# Altium PCB DK_LOCK_V1.1.PcbDoc
Units mm, origin at the board's own origin, x right, y up, seen from the top; angles counter-clockwise.
Board outline 115 x 45 mm, 2 copper layers (Top Layer, Bottom Layer); 88 components, 61 nets, 346 pads, 184 vias.
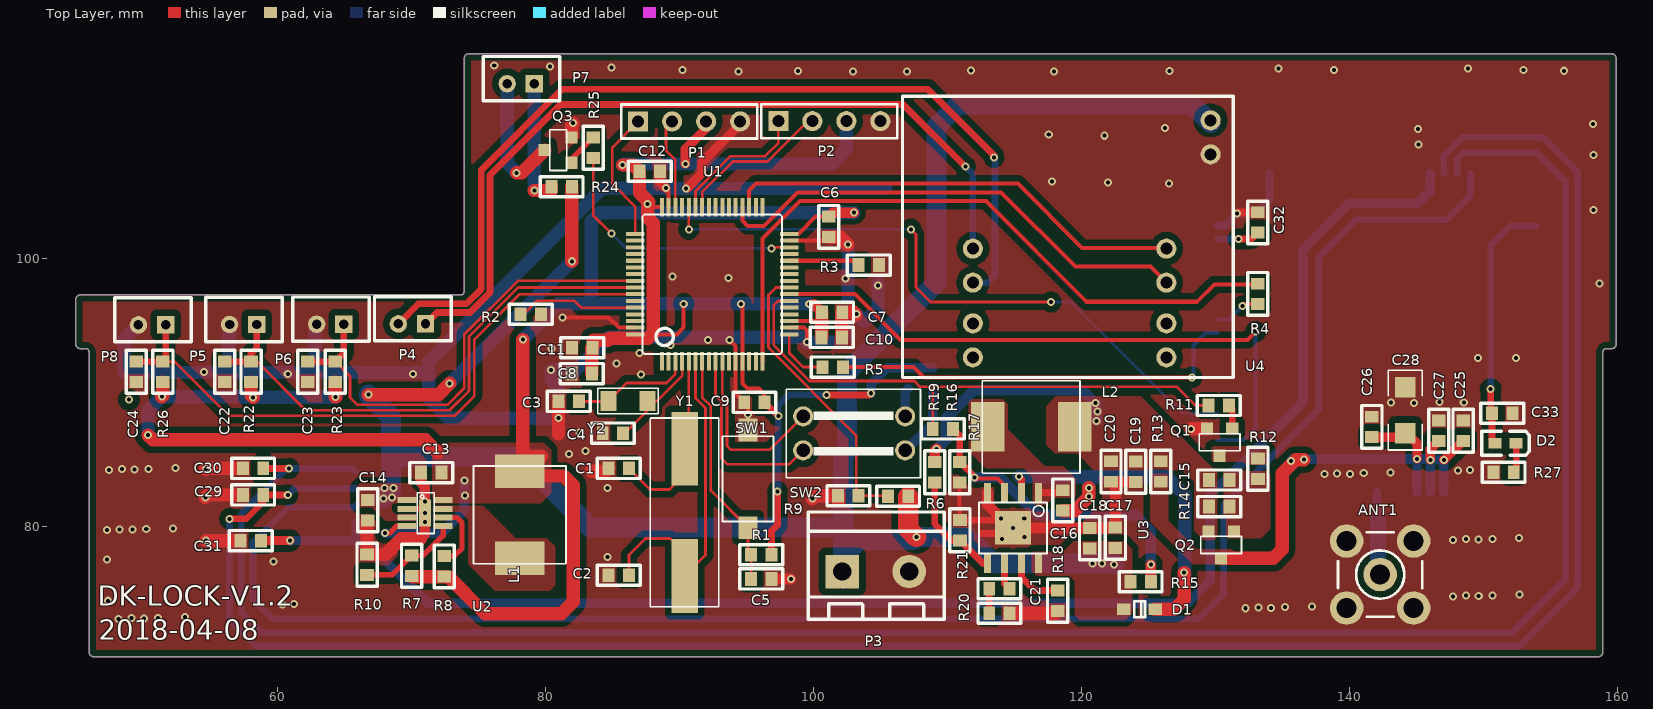
[diagram p0: Top Layer view]
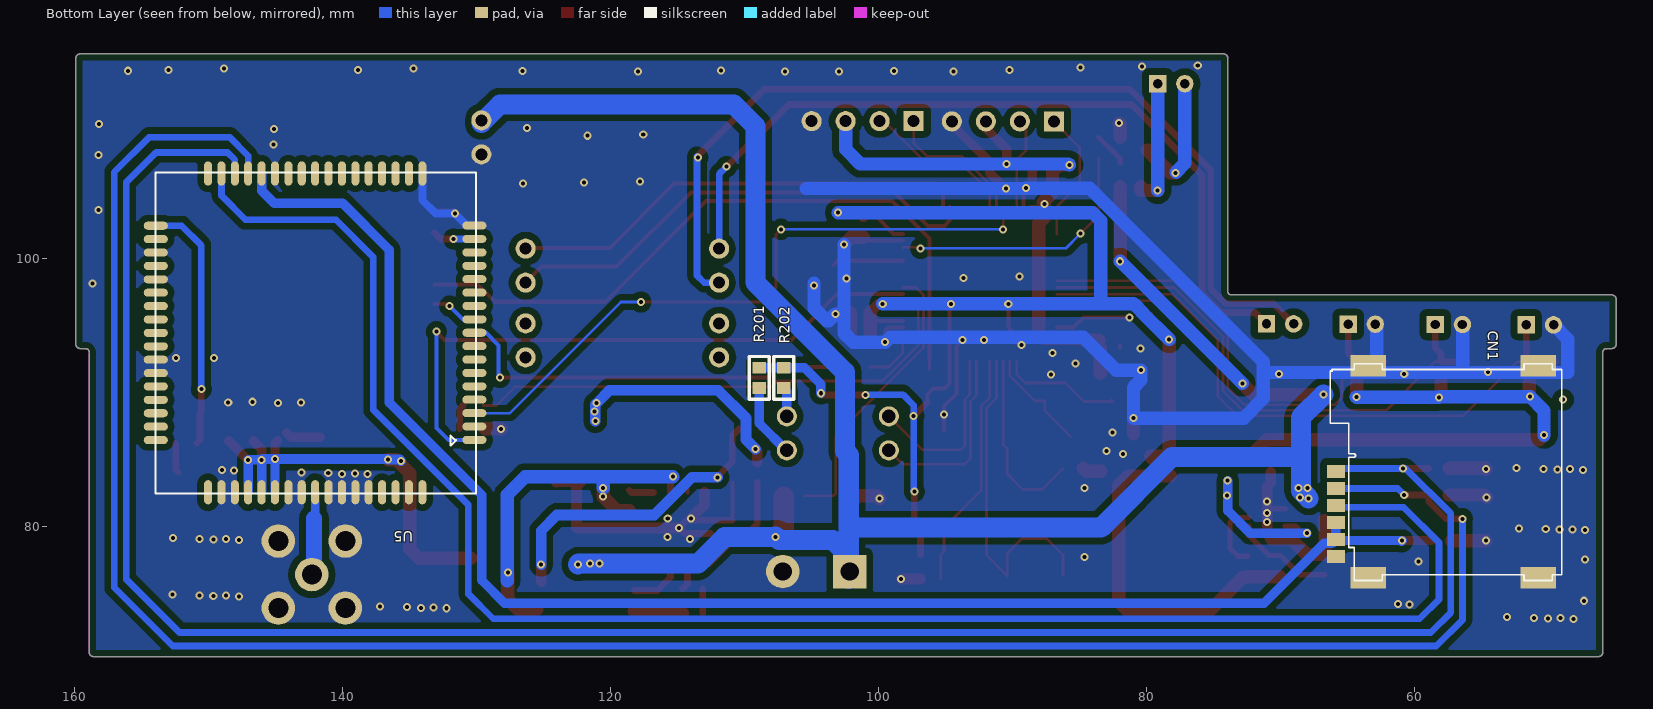
[diagram p1: Bottom Layer view, seen from below]

## Layer stack, top to bottom
Top Solder: solder mask 0.0102, Solder Resist, Dk 3.5
Top Layer: signal copper 0.0356
Dielectric 1: dielectric 0.32, FR-4, Dk 4.8
Bottom Layer: signal copper 0.0356
Bottom Solder: solder mask 0.0102, Solder Resist, Dk 3.5

## Board outline
45.913,72.554 45.913,92.954 ccw(c45.613,92.954) 45.613,93.254 45.213,93.254 cw(c45.213,93.554) 44.913,93.554 44.913,96.954 cw(c45.213,96.954) 45.213,97.254 73.613,97.254 ccw(c73.613,97.554) 73.913,97.554 73.913,114.954 cw(c74.213,114.954) 74.213,115.254 159.613,115.254 cw(c159.613,114.954) 159.913,114.954 159.913,93.554 cw(c159.613,93.554) 159.613,93.254 159.213,93.254 ccw(c159.213,92.954) 158.913,92.954 158.913,70.554 cw(c158.613,70.554) 158.613,70.254 46.213,70.254 cw(c46.213,70.554) 45.913,70.554

## Design rules (kind name [scope] priority, off if disabled: settings)
Clearance [All] p1: gap=0.15 ignorepadtopadclearanceinfootprint=FALSE
DiffPairsRouting d3 [All] p1: maxlimit=0.2 minlimit=0.2 mostfreqgap=0.2 toplayer_minwidth=0.2 toplayer_maxwidth=0.2 toplayer_prefwidth=0.2 bottomlayer_minwidth=0.2 bottomlayer_maxwidth=0.2 bottomlayer_prefwidth=0.2 maxuncoupledlength=12.7
DiffPairsRouting D1 [All] p2: maxlimit=0.2 minlimit=0.2 mostfreqgap=0.2 toplayer_minwidth=0.2 toplayer_maxwidth=0.2 toplayer_prefwidth=0.2 bottomlayer_minwidth=0.2 bottomlayer_maxwidth=0.2 bottomlayer_prefwidth=0.2 maxuncoupledlength=12.7
DiffPairsRouting d2 [All] p3: maxlimit=0.2 minlimit=0.2 mostfreqgap=0.2 toplayer_minwidth=0.2 toplayer_maxwidth=0.2 toplayer_prefwidth=0.2 bottomlayer_minwidth=0.2 bottomlayer_maxwidth=0.2 bottomlayer_prefwidth=0.2 maxuncoupledlength=12.7
DiffPairsRouting [All] p4: maxlimit=0.254 minlimit=0.254 mostfreqgap=0.254 toplayer_minwidth=0.381 toplayer_maxwidth=0.381 toplayer_prefwidth=0.381 bottomlayer_minwidth=0.381 bottomlayer_maxwidth=0.381 bottomlayer_prefwidth=0.381 maxuncoupledlength=12.7
HoleToHoleClearance [All] p1: gap=0.15 allowstackedmicrovias=TRUE
MatchedLengths DiffPair_MatchedLengths [All] p1 off: tolerance=25.4 checknetsindiffpair=FALSE checkdiffpairvsdiffpair=TRUE checkxsignals=TRUE checkothers=TRUE
MatchedLengths DiffPair_MatchedLengths_1 [All] p2 off: tolerance=25.4 checknetsindiffpair=FALSE checkdiffpairvsdiffpair=TRUE checkxsignals=TRUE checkothers=TRUE
MatchedLengths DiffPair_MatchedLengths_2 [All] p3 off: tolerance=25.4 checknetsindiffpair=FALSE checkdiffpairvsdiffpair=TRUE checkxsignals=TRUE checkothers=TRUE
MinimumSolderMaskSliver [All] p1: minsoldermaskwidth=0
PolygonConnect [All] p1: connectstyle=Direct reliefconductorwidth=0.254 reliefentries=4 polygonreliefangle="90 Angle" airgapwidth=0.254
RoutingVias [All] p1: holewidth=0.3 width=0.6 viastyle="Through Hole" minholewidth=0.3 minwidth=0.6 maxholewidth=0.8 maxwidth=1.27
SilkToSilkClearance [All] p1: silktosilkclearance=0
SilkToSolderMaskClearance [IsPad] p1: minsilkscreentomaskgap=0 clearancetoexposedcopper=TRUE
SolderMaskExpansion [All] p1: expansion=0.102
Width [All] p1: maxlimit=2 minlimit=0.2 preferedwidth=0.5
25 further rules are at their usual default settings.

## Classes and differential pairs
component class U_DK_GU600E_V10: ANT1 C25 C26 C27 C28 C29 C30 C31 C32 C33 D2 R27 U5
component class U_DK_STM32L151: C1 C2 C3 C4 C5 C6 C7 C8 C9 C10 C11 C12 P1 P2 R1 R2 R3 R4 R5 R201 R202 SW1 SW2 U1 Y1
component class U_DK_POWER: C13 C14 C15 C16 C17 C18 C19 C20 C21 D1 L1 L2 P3 Q1 Q2 R6 R7 R8 R9 R10 R11 R12 R13 R14 R15 R16 R17 R18 R19 R20 R21 U2 U3
component class U_DK_MOTO: C22 C23 C24 P4 P5 P6 P7 P8 Q3 R22 R23 R24 R25 R26 U4

## Components (designator, comment, footprint, x,y, rotation, side; value= is the part's Value field where it differs from the comment)
ANT1 "SMB" SMB_V-RJ45 142.298,76.378 r0 top locked
C1 "Cap" 0603 84.684,84.303 r0 top value=20pF
C2 "Cap" 0603 84.684,76.327 r0 top value=20pF
C3 "Cap" 0603 80.95,89.306 r0 top value=6.8pF
C4 "Cap" 0603 84.252,86.944 r0 top value=6.8pF
C5 "Cap" 0603 95.326,76.048 r0 top value=0.1uF
C6 "Cap" 0603 101.117,101.575 r90 top value=100nF
C7 "Cap" 0603 102.133,95.961 r180 top locked value=100nF
C8 "Cap" 0603 81.915,91.389 r0 top value=100nF
C9 "Cap" 0603 94.818,89.23 r0 top value=100nF
C10 "Cap" 0603 102.108,94.082 r180 top value=100nF
C11 "Cap" 0603 81.966,93.32 r0 top value=10uF
C12 "NC" 0603 88.519,106.502 r180 top value=10uF
C13 "Cap" 0603 70.688,83.998 r0 top value=4.7uF
C14 "Cap" 0603 66.7,80.416 r90 top value=4.7uF
C15 "Cap" 0603 129.515,83.439 r0 top value=2.2uF
C16 "Cap" 0603 118.593,82.677 r270 top value=0.1uF
C17 "Cap" 0603 122.53,79.883 r270 top value=10uF
C18 "Cap" 0603 120.599,79.858 r270 top value=10uF
C19 "Cap" 0603 124.054,83.287 r90 top value=22uF
C20 "Cap" 0603 122.199,83.312 r90 top value=22uF
C21 "Cap" 0603 114.63,75.311 r180 top value=2.7nF
C22 "Cap" 0603 56.032,90.754 r90 top value=0.1uF
C23 "Cap" 0603 62.23,90.754 r90 top value=0.1uF
C24 "Cap" 0603 49.428,90.754 r90 top value=0.1uF
C25 "Cap" 0603 148.488,87.884 r270 top value=39pF
C26 "Cap" 0603 141.681,88.163 r270 top value=39pF
C27 "Cap" 0603 146.66,87.884 r270 top value=100nF/50V
C28 "Cap" 1206 144.17,90.373 r270 top value=100uF/6.3V
C29 "Cap" 0603 57.379,82.321 r0 top value=39pF
C30 "Cap" 0603 57.379,84.303 r0 top value=39pF
C31 "Cap" 0603 57.201,78.918 r0 top value=100nF
C32 "Cap" 0603 133.147,103.429 r270 top value=1uF
C33 "Cap" 0603 152.171,88.417 r180 top value=100nF
CN1 "SIM_BLOCK" SIM_BLOCK 65.84,77.724 r90 bottom locked
D1 "1N4148WST4" SOD-323 124.333,73.787 r180 top
D2 "LED GREEN" LED0603 150.876,86.182 r0 top locked
L1 "Inductor" 0630 78.054,77.599 r90 top value=22uH
L2 "Inductor" 0630 113.005,87.401 r0 top locked value=4.7uH
P1 "SWD" HDR1X4 86.893,110.211 r0 top
P2 "UART1" HDR1X4 97.358,110.236 r0 top
P3 "BATT" HEAD2L-0.8 102.133,76.606 r0 top
P4 "MOTOR" COM2 71.018,95.098 r180 top
P5 "L_OFF" COM2 58.42,95.047 r180 top locked
P6 "L_ON" COM2 64.922,95.072 r180 top locked
P7 "BELL" COM2 79.146,113.03 r180 top locked
P8 "BUTTON" COM2 51.613,95.021 r180 top locked
Q1 "MOSFET-N" SOT-23A 130.302,86.258 r180 top
Q2 "MOSFET-P" SOT-23A 130.419,78.594 r180 top
Q3 "NPN" SOT-23A 80.918,108.077 r90 top locked
R1 "Res2" 0603 96.85,77.851 r180 top value=10K
R2 "Res2" 0603 79.629,95.809 r180 top value=10K
R3 "Res2" 0603 104.877,99.492 r180 top value=10K
R4 "Res2" 0603 133.147,96.571 r90 top value=3K
R5 "Res2" 0603 102.184,91.872 r180 top locked value=100R
R6 "Res2" 0603 105.537,82.22 r0 top value="30K %1"
R7 "Res2" 0603 69.977,77.8 r270 top value=300K
R8 "Res2" 0603 72.415,77.749 r270 top value=100K
R9 "Res2" 0603 103.353,82.271 r180 top value="10K %1"
R10 "Res2" 0603 66.65,77.876 r270 top value=100K
R11 "Res2" 0603 131.013,89.002 r180 top value=1K
R12 "Res2" 0603 133.172,83.515 r90 top value=10K
R13 "NC" 0603 125.908,84.836 r270 top value=0
R14 "Res2" 0603 129.515,81.458 r0 top value=100K
R15 "NC" 0603 125.171,75.844 r180 top value=0
R16 "Res2" 0603 109.042,83.261 r90 top value="91K 1%"
R17 "Res2" 0603 110.896,83.261 r90 top value=10K
R18 "Res2" 0603 118.212,73.66 r90 top locked value=137K
R19 "Res2" 0603 108.89,87.249 r0 top value=0
R20 "Res2" 0603 114.63,73.482 r180 top value=13K
R21 "Res2" 0603 110.922,80.442 r270 top value="24K 1%"
R22 "Res2" 0603 57.988,92.278 r270 top value=10K
R23 "Res2" 0603 64.287,92.278 r270 top value=10K
R24 "Res2" 0603 80.416,105.334 r0 top value=0
R25 "Res2" 0603 83.541,107.493 r90 top value=1K
R26 "Res2" 0603 51.41,92.278 r270 top value=10K
R27 "Res2" 0603 152.273,84.023 r180 top locked value=1K
R201 "Res2" 0603 108.89,91.821 r270 bottom value=10K
R202 "Res2" 0603 107.061,91.821 r270 bottom value=10K
SW1 "SW-PB" 3*6*4.3 95.098,83.523 r90 top locked
SW2 "SW DIP-2" SW-2*4 103.022,86.919 r90 top locked
U1 "STM32L151RCT6" LQFP64 92.425,98.06 r0 top locked
U2 "TPS62120" TPS62120 69.628,81.94 r270 top
U3 "RT7272B" RT7272B 116.789,82.508 r180 top locked
U4 "MOTO" MOTO2 106.633,91.091 r0 top locked
U5 "GU900E" SIM900-68P 130.049,106.424 r0 bottom locked
Y1 "8M" SMT-OSC 90.373,85.776 r270 top locked
Y2 "32.768M" XTAL32.786 83.884,88.382 r0 top

## Footprints (in the part's own frame and the unit in brackets; to place one, negate y for a bottom-side part, rotate by r counter-clockwise, add the part's x,y. Pads: shape width x height; smd on the part's side, far side on the other; paste and mask are expansions set on the pad)
3*6*4.3 [mm]
  rect 1.7x1.4 smd: 1(-3.65,0) 2(3.65,0)
  silkscreen extent -3.17,-1.91 3.17,1.91
0603 [mil]
  rect 35x40 smd: 1(0,0) 2(60,0)
  silkscreen extent -33,-30 93,30
0630 [mm]
  rect 2.5x3.7 smd: 1(0,0) 2(6.5,0)
  silkscreen extent -0.41,-3.45 6.88,3.45
1206 [mil]
  rect 60x60 smd: 1(0,0) 2(135,0)
  silkscreen extent -50,-50 185,50
COM2 [mm]
  rect 1.3x1.3 hole 0.7: 1(0,0)
  round 1.3 hole 0.7: 2(2.032,0)
  silkscreen extent -1.91,-2.03 3.81,1.27
HDR1X4 [mm] "Connector; Header; 4 Position"
  rect 1.5x1.5 hole 0.9: 1(0,0)
  round 1.5 hole 0.9: 2(2.54,0) 3(5.08,0) 4(7.62,0)
  silkscreen extent -1.27,-1.27 8.89,1.27
HEAD2L-0.8 [mm]
  rect 2.5x2.5 hole 1.35: 1(0,0)
  round 2.5 hole 1.35: 2(5,0)
  silkscreen extent -2.54,-3.56 7.62,4.44
LED0603 [mil]
  rect 38x30 smd: 1(0,0) 2(62,0)
  silkscreen extent -39,-35 101,35
LQFP64 [mm]
  rect 0.3x1.4 smd: 1(-3.75,-5.75) 2(-3.25,-5.75) 3(-2.75,-5.75) 4(-2.25,-5.75) 5(-1.75,-5.75) 6(-1.25,-5.75) 7(-0.75,-5.75) 8(-0.25,-5.75) 9(0.25,-5.75) 10(0.75,-5.75) 11(1.25,-5.75) 12(1.75,-5.75) 13(2.25,-5.75) 14(2.75,-5.75) 15(3.25,-5.75) 16(3.75,-5.75) 33(3.75,5.75) 34(3.25,5.75) 35(2.75,5.75) 36(2.25,5.75) 37(1.75,5.75) 38(1.25,5.75) 39(0.75,5.75) 40(0.25,5.75) 41(-0.25,5.75) 42(-0.75,5.75) 43(-1.25,5.75) 44(-1.75,5.75) 45(-2.25,5.75) 46(-2.75,5.75) 47(-3.25,5.75) 48(-3.75,5.75)
  rect 1.4x0.3 smd: 17(5.75,-3.75) 18(5.75,-3.25) 19(5.75,-2.75) 20(5.75,-2.25) 21(5.75,-1.75) 22(5.75,-1.25) 23(5.75,-0.75) 24(5.75,-0.25) 25(5.75,0.25) 26(5.75,0.75) 27(5.75,1.25) 28(5.75,1.75) 29(5.75,2.25) 30(5.75,2.75) 31(5.75,3.25) 32(5.75,3.75) 49(-5.75,3.75) 50(-5.75,3.25) 51(-5.75,2.75) 52(-5.75,2.25) 53(-5.75,1.75) 54(-5.75,1.25) 55(-5.75,0.75) 56(-5.75,0.25) 57(-5.75,-0.25) 58(-5.75,-0.75) 59(-5.75,-1.25) 60(-5.75,-1.75) 61(-5.75,-2.25) 62(-5.75,-2.75) 63(-5.75,-3.25) 64(-5.75,-3.75)
  silkscreen extent -5.21,-5.21 5.21,5.21
MOTO2 [mm]
  round 1.5 hole 0.9: 1(23,19.2) 2(19.7,9.62) 3(19.7,7.08) 4(19.7,4.04) 5(19.7,1.5) 6(5.25,1.5) 7(5.25,4.04) 8(5.25,7.08) 9(5.25,9.62) 10(23,16.66)
  silkscreen extent 0,0 24.7,21
RT7272B [mm]
  rect 0.5x1.4 smd: 1(0,0) 2(1.27,0) 3(2.54,0) 4(3.81,0) 5(3.81,5.3) 6(2.54,5.3) 7(1.27,5.3) 8(0,5.304)
  rect 2.7x2.5 smd: 9(1.905,2.65)
  silkscreen extent -0.64,0.74 4.44,4.55
SIM900-68P [mm]
  oval 1.8x0.6 smd: 1(0.11,19.99) 2(0.11,18.99) 3(0.11,17.99) 4(0.11,16.99) 5(0.11,15.99) 6(0.11,14.99) 7(0.11,13.99) 8(0.11,12.99) 9(0.11,11.99) 10(0.11,10.99) 11(0.11,9.99) 12(0.11,8.99) 13(0.11,7.99) 14(0.11,6.99) 15(0.11,5.99) 16(0.11,4.99) 17(0.11,3.99) 35(23.9,4) 36(23.9,5) 37(23.9,6) 38(23.9,7) 39(23.9,8) 40(23.9,9) 41(23.9,10) 42(23.9,11) 43(23.9,12) 44(23.9,13) 45(23.9,14) 46(23.9,15) 47(23.9,16) 48(23.9,17) 49(23.9,18) 50(23.9,19) 51(23.9,20)
  oval 0.6x1.8 smd: 18(4,0.1) 19(5,0.1) 20(6,0.1) 21(7,0.1) 22(8,0.1) 23(9,0.1) 24(10,0.1) 25(11,0.1) 26(12,0.1) 27(13,0.1) 28(14,0.1) 29(15,0.1) 30(16,0.1) 31(17,0.1) 32(18,0.1) 33(19,0.1) 34(20,0.1) 52(20,23.9) 53(19,23.9) 54(18,23.9) 55(17,23.9) 56(16,23.9) 57(15,23.9) 58(14,23.9) 59(13,23.9) 60(12,23.9) 61(11,23.9) 62(10,23.9) 63(9,23.9) 64(8,23.9) 65(7,23.9) 66(6,23.9) 67(5,23.9) 68(4,23.9)
  silkscreen extent -0.01,0.01 23.92,24
SIM_BLOCK [mm]
  rect 1x1.35 smd: C1(1.27,0) C2(3.81,0) C3(6.35,0) C5(0,0) C6(2.54,0) C7(5.08,0)
  rect 1.6x2.65 smd: C4(-1.575,-2.413) C8(-1.575,-15.113) C9(14.249,-15.113) C10(14.249,-2.413)
  silkscreen extent -1.79,-16.87 14.39,0.41
SMB_V-RJ45 [mm] "Connector; SMB Straight"
  round 2.5 hole 1.5: 1(0,0) 2(-2.5,-2.5) 2(-2.5,2.5) 2(2.5,-2.5) 2(2.5,2.5)
  silkscreen extent -3.15,-3.15 3.15,3.15
SMT-OSC [mm]
  rect 5.5x2 smd: 1(0,0) 2(9.5,0)
  silkscreen extent -2.29,-2.57 11.81,2.54
SOD-323 [mm]
  rect 1x0.83 smd: 1(1.18,0) 2(-1.18,0)
  silkscreen extent -0.4,-0.6 0.4,0.6, body extent -1.35,-0.62 1.35,0.63, height 1.1
SOT-23A [mm]
  rect 0.9x0.9 smd: 1(-0.95,-1.01) 2(0,1.01) 3(0.95,-1.01)
  silkscreen extent -1.52,-0.64 1.52,0.64
SW-2*4 [mm]
  round 1.5 hole 1: 1(-1.27,-3.81) 2(1.27,-3.81) 3(1.27,3.81) 4(-1.27,3.81)
  silkscreen extent -3.3,-4.95 3.3,5.08
TPS62120 [mm]
  rect 0.45x1.4 smd: 1(0,0) 2(0.65,0) 3(1.3,0) 4(1.95,0) 5(1.95,2.7) 6(1.3,2.7) 7(0.65,2.7) 8(0,2.7)
  rect 2x0.9 smd: 9(0.975,1.35)
  silkscreen extent -0.55,0.76 2.5,2.03
XTAL32.786 [mm]
  rect 1.2x1.5 smd: 1(0.8,0.95) 2(3.7,0.95)
  silkscreen extent 0,0 4.5,1.9

## Part data
ANT1: "SMB Straight Connector", LatestRevisionDate=17-Jul-2002, LatestRevisionNote="Re-released for DXP Platform.", Publisher="Altium Limited"
C1 C2 C3 C4 C5 C6 C7 C8 C9 C10 C11 C13 C14 C15 C16 C17 C18 C19 C20 C21 C22 C23 C24 C25 C26 C27 C28 C29 C30 C31 C32 C33: "Capacitor", LatestRevisionDate=17-Jul-2002, LatestRevisionNote="Re-released for DXP Platform.", PackageDescription="Radial Cap, Thru-Hole; 2 Leads; 0.3 in Pin Spacing", PackageReference=RAD-0.3, Published=8-Jun-2000, Publisher="Altium Limited"
C12: library part Cap, "Capacitor", LatestRevisionDate=17-Jul-2002, LatestRevisionNote="Re-released for DXP Platform.", PackageDescription="Radial Cap, Thru-Hole; 2 Leads; 0.3 in Pin Spacing", PackageReference=RAD-0.3, Published=8-Jun-2000, Publisher="Altium Limited"
CN1: library part SIM_BLOCK_2
D1: library part Diode, "Default Diode", Code_JEDEC=DO-214-AB, LatestRevisionDate=17-Jul-2002, LatestRevisionNote="Re-released for DXP Platform.", PackageDescription="DO-214-AB/SMC; 2 C-Bend Leads; Body 7.9 x 5.9 mm, inc. leads (LxW)", PackageReference=SMC, PackageVersion=Sep-1996, Published=8-Jun-2000, Publisher="Altium Limited"
D2: library part LED2, "Typical RED, GREEN, YELLOW, AMBER GaAs LED", LatestRevisionDate=17-Jul-2002, LatestRevisionNote="Re-released for DXP Platform.", PackageDescription="SM LED; 2 Flat Leads", PackageReference=3.2X1.6X1.1, PackageVersion=Feb-2002, Published=8-Jun-2000, Publisher="Altium Limited"
P1 P2: library part "Header 4", "Header, 4-Pin", LatestRevisionDate=17-Jul-2002, LatestRevisionNote="Re-released for DXP Platform.", Publisher="Altium Limited"
P3 P4 P5 P6 P7 P8: library part "Header 2", "Header, 2-Pin", LatestRevisionDate=17-Jul-2002, LatestRevisionNote="Re-released for DXP Platform.", Publisher="Altium Limited"
Q1: library part NMOS-2, "N-Channel Power MOSFET", ComponentLink1Description="Manufacturer Link", ComponentLink1URL=http://www.irf.com/, DatasheetVersion=PD-9.814, LatestRevisionDate=17-Jul-2002, LatestRevisionNote="Re-released for DXP Platform.", Note="Pin 2 is electrically connected to pin 4.", PackageDescription="TO, Thru-Hole, Vertical, Heatsink Mounted; 3 In-Line Leads; Pitch 2.54 mm", PackageReference=TO-220AB, PackageVersion=Feb-1997, Published=8-Jun-2000, Publisher="Altium Limited"
Q2: library part PMOS-2, "P-Channel Power MOSFET", ComponentLink1Description="Manufacturer Link", ComponentLink1URL=http://www.irf.com/, DatasheetVersion=PD-9.390D, LatestRevisionDate=17-Jul-2002, LatestRevisionNote="Re-released for DXP Platform.", Note="Pin 4 not drawn and electrically connected to Pin 2.", PackageDescription="TO, Thru-Hole, Vertical, Heatsink Mounted; 3 In-Line Leads; Pitch 2.54 mm", PackageReference=TO-220AB, PackageVersion=Feb-1997, Published=8-Jun-2000, Publisher="Altium Limited"
Q3: "NPN Bipolar Transistor", Code_JEDEC=TO-226-AA, LatestRevisionDate=17-Jul-2002, LatestRevisionNote="Re-released for DXP Platform.", PackageDescription="TO, Flat Index; 3 In-Line, Axial Leads; Body Dia. 4.8mm; Leads 0.55 x 0.51 mm (max)", PackageReference=TO-226-AA, Published=8-Jun-2000, Publisher="Altium Limited"
R1 R2 R3 R4 R5 R6 R7 R8 R9 R10 R11 R12 R14 R16 R17 R18 R19 R20 R21 R22 R23 R24 R25 R26 R27 R201 R202: "Resistor", LatestRevisionDate=17-Jul-2002, LatestRevisionNote="Re-released for DXP Platform.", PackageDescription="Axial Device, Thru-Hole; 2 Leads; 0.4 in Pin Spacing", PackageReference=AXIAL-0.4, Published=8-Jun-2000, Publisher="Altium Limited"
R13 R15: library part Res2, "Resistor", LatestRevisionDate=17-Jul-2002, LatestRevisionNote="Re-released for DXP Platform.", PackageDescription="Axial Device, Thru-Hole; 2 Leads; 0.4 in Pin Spacing", PackageReference=AXIAL-0.4, Published=8-Jun-2000, Publisher="Altium Limited"
SW1: "Switch", LatestRevisionDate=17-Jul-2002, LatestRevisionNote="Re-released for DXP Platform.", PackageDescription="Switch; 2 Leads", PackageReference=SPST-2, Published=24-Mar-1999, Publisher="Altium Limited"
SW2: "DIP Switch, 2 Position, SPST", LatestRevisionDate=17-Jul-2002, LatestRevisionNote="Re-released for DXP Platform.", PackageReference=DIP-4, Published=24-Mar-1999, Publisher="Altium Limited"
U1: "ARM Cortex-M3 32-bit MCU, 256 KB Flash, 32 KB Internal RAM, 51 I/Os, 64-pin LQFP, -40 to 85 degC, Tray", I/Os (High Current)=51, Manufacturer=STMicroelectronics, Operating Frequency(F) (Processor speed) (MHz)=32, Supply Voltage(Vcc) min (V)=1.65, ComponentLink1Description="Manufacturer URL", ComponentLink1URL=http://www.st.com/web/en/home.html, ComponentLink2Description=Datasheet, ComponentLink2URL=http://www.st.com/st-web-ui/static/active/en/resource/technical/document/datasheet/DM00048356.pdf, ComponentLink3Description="Package Specification", ComponentLink3URL=http://www.st.com/st-web-ui/static/active/en/resource/technical/document/datasheet/DM00037051.pdf, Core="ARM Cortex-M3", D/A Converter="2x12-bit (2 Channel)", Data E2PROM nom (B)=8192, DatasheetVersion="Rev. 3", FLASH Size (Prog) (kB)=256, Internal RAM Size (kB)=32, Mounting Technology="Surface Mount", PackageDescription="64-Pin Low Profile Quad Flat Package, 10 x 10 mm Body, 0.5 mm Pitch", PackageReference=LQFP64, PackageVersion="Rev. 4, 06/2013", Packing=Tray, PartNumber=STM32L151RCT6
Y1 Y2: library part XTAL, "Crystal Oscillator", LatestRevisionDate=17-Jul-2002, LatestRevisionNote="Re-released for DXP Platform.", PackageDescription="Crystal, Thru-Hole; 2 Leads; Body 3.1 x 8.2 mm (Dia.xH)", PackageReference=R38, Published=8-Jun-2000, Publisher="Altium Limited"
L1 L2: Code_IEC=1005, Code_JEITA=0402, LatestRevisionDate=29-May-2009, LatestRevisionNote="IPC-7351 Footprint Added.", PackageDescription="Chip Inductor", PackageReference=0402-A, Published=8-Jun-2000, Publisher="Altium Limited"

## Via types
v1: diameter 0.6, hole 0.3, Top Layer to Bottom Layer, tented both sides, 184 vias

## Nets (pads, with @x,y where several pads share a name; then routed paths per layer and width w, separated by ;. In a path a pad name is that pad's centre, name@x,y a point inside that pad or via, vN(x,y) a via of type N, cw(c..) or ccw(c..) an arc to the next point about the centre after c; other vN are vias at no path point)
BATT: C14.2 C17.2 C18.2 D1.1 P3.1 R6.2 R15.2 R24.2 U2.1 U2.3 U3.8 U4.1 | length 152.9
  Top Layer w1: v1(66.751,89.814) 71.984,89.814 v1(72.822,90.653) ; v1(81.94,99.771) R24.2
  Top Layer w1.5: R6.2 107.061,79.781 v1(107.671,79.172)
  Bottom Layer w1: v1(72.822,90.653) v1(81.94,99.771)
  Bottom Layer w1.5: v1(66.751,89.814) 68.453,88.113 68.453,85.268 ; v1(67.869,82.067) 68.453,82.652 68.453,85.268 ; P3.1@102.21,76.048 P3.1@102.21,77.775 ; v1(107.671,79.172) 111.481,79.172 113.462,77.191 v1(120.828,77.191) v1(121.539,77.191) 122.377,77.191 v1(122.428,77.14) ; v1@107.671,79.223 107.417,78.969 103.403,78.969 P3.1@102.21,77.775 ; U4.1@129.633,110.091 128.243,111.481 110.795,111.481 109.169,109.855 109.169,98.171 102.489,91.491 102.489,85.598 102.21,85.319 102.21,79.883 ; 68.453,85.268 68.555,85.166 78.075,85.166 83.358,79.883 102.21,79.883 ; P3.1@102.21,77.775 102.21,79.883
  other v1: 68.529,82.144 67.97,82.829 68.631,82.855
BOOT0: R2.2 U1.60 | length 9.2
  Top Layer w0.2: R2.2 78.323,95.809 79.339,96.825 82.118,96.825 82.633,96.31 U1.60
BOOT1: R3.2 U1.28 | length 5.3
  Top Layer w0.3: U1.28 103.035,99.81 R3.2
GND: ANT1.2 C1.1 C2.1 C3.1 C4.1 C5.2 C6.1 C7.1 C8.1 C9.1 C10.1 C11.1 C12.1 C13.1 C14.1 C17.1 C18.1 C19.1 C20.1 C22.1 C23.1 C24.1 C25.1 C26.1 C27.1 C28.1 C29.1 C30.1 C31.1 C32.1 C33.1 CN1.C4 CN1.C5 CN1.C8 CN1.C9 CN1.C10 P1.4 P2.4 P3.2 P5.2 P6.2 P8.2 Q1.3 Q3.3 R2.1 R3.1 R9.2 R10.1 R17.1 R18.1 R20.1 R21.1 R27.2 SW1.2 U1.12 U1.18 U1.31 U1.47 U1.63 U2.2 U2.9 U3.4 U3.9 U4.10 U5.17 U5.18 U5.29 U5.37 U5.39 U5.45 U5.46 U5.53 U5.54 U5.58 U5.59 U5.61 U5.62 U5.63 U5.64 | length 226.2
  Top Layer w0.3: R2.1 R2.1@79.654,95.834 ; v1(81.229,95.58) 84.684,95.58 85.454,94.81 U1.63 ; C11.1 C11.1@81.966,93.466 ; v1(88.976,105.232) 89.175,105.032 U1.47 ; v1(93.726,93.878) 94.175,93.429 U1.12 94.175,89.873 C9.1 95.098,88.951 v1(95.098,88.341) SW1.2 ; U1.18 99.272,94.81 99.492,94.59 v1(99.492,93.726) ; U1.31 100.853,101.31 C6.1 ; R17.1 110.896,80.467 R21.1
  Top Layer w0.4: U2.2 70.653,81.29 v1(70.968,80.976)
  Top Layer w0.5: R21.1 114.3,80.442 v1(114.884,79.858) 114.478,79.451 112.522,79.451
  Top Layer w0.6: v1(131.623,103.327) 131.724,103.429 C32.1
  Top Layer w0.7: C12.1 88.519,105.689 v1(88.976,105.232) ; v1@90.575,105.248 91.669,106.342 91.669,107.163 94.513,110.007 P1.4
  Top Layer w0.8: 70.618,79.065 70.968,79.415 v1(70.968,80.289) U2.9@70.968,80.965 ; C13.1 70.688,83.236 70.968,82.956 v1(70.968,80.976) ; C5.2 v1@98.298,76.048 ; U3.4 112.979,81.585 v1(113.995,80.569) ; v1(114.884,79.858) C18.1 122.504,79.858 C17.1 122.53,82.982 C20.1 124.028,83.312 C19.1
  Top Layer w1: v1(54.585,82.144) 54.762,82.321 C29.1 ; v1(54.61,84.252) 54.661,84.303 C30.1 ; v1(54.635,78.918) C31.1 ; C14.1 66.65,80.366 R10.1 68.024,77.876 69.213,79.065 70.618,79.065 ; 80.95,86.893 v1(80.95,88.062) C3.1 ; Q3.3 81.928,109.995 v1(82.017,110.084) ; 83.396,84.099 84.48,84.099 C1.1 ; v1(99.898,82.042) 100.127,82.271 R9.2 R9.2@101.829,81.911 ; C6.1 102.006,101.575 v1(102.565,101.016) ; C10.1 102.108,95.936 C7.1 102.989,95.961 v1@103.158,95.792 ; R20.1 118.034,73.482 R18.1 ; v1(128.168,87.249) 128.188,87.268 Q1.3
  Bottom Layer w0.6: U5.17 130.73,102.434 v1(131.623,103.327) 133.045,103.327 134.049,104.331 U5.18
  Bottom Layer w1: P8.2 48.514,93.955 48.514,91.465 56.363,91.465 ; P5.2 56.363,95.021 56.363,91.465 ; P6.2 62.789,94.971 62.789,91.542 CN1.C10@62.865,91.465 ; v1(102.565,101.016) 102.565,94.412 101.879,93.726 v1(99.492,93.726) 99.111,94.107 84.709,94.107 82.245,91.643 v1(80.391,91.643) 80.391,90.907 80.95,90.348 v1(80.95,88.062) 72.72,88.062 71.247,89.535 71.247,91.465 ; v1(103.2,95.834) 103.708,95.326 103.861,95.326 104.8,96.266 v1(104.8,97.968) v1@104.8,98.146 ; 105.385,105.207 v1(90.449,105.207) 89.002,105.207 v1(88.976,105.232) 84.201,105.232 71.247,92.278 71.247,91.465 ; 56.363,91.465 CN1.C10@62.865,91.465 ; CN1.C10@62.865,91.465 71.247,91.465
  other v1: 48.108,73.076 50.013,73.101 49.073,73.127 51.054,73.152 53.061,73.203 132.258,73.863 134.163,73.889 133.223,73.914 135.204,73.939 137.211,73.99 60.325,74.143 61.214,74.168 47.32,74.422 147.752,74.752 149.657,74.778 148.717,74.803 150.698,74.828 152.705,74.879 98.298,76.051 59.665,77.368 47.244,77.495 84.607,77.673 147.726,78.969 149.631,78.994 114.046,79.019 148.692,79.019 150.673,79.045 152.679,79.096 115.748,79.172 47.219,79.705 49.124,79.731 48.184,79.756 50.165,79.781 52.172,79.832 115.722,80.569 70.993,81.839 84.607,82.829 138.125,83.871 140.03,83.896 139.09,83.922 141.072,83.947 143.078,83.998 148.107,84.15 148.996,84.176 47.396,84.201 49.301,84.226 48.362,84.252 50.343,84.277 52.349,84.328 81.737,85.369 82.956,85.598 82.525,86.995 144.831,89.179 143.104,89.23 148.539,89.23 146.736,89.281 87.122,91.313 60.731,91.364 70.079,91.364 54.483,91.491 85.293,92.126 149.606,92.532 152.425,92.532 86.995,92.939 80.416,93.269 89.325,93.52 92.126,93.904 158.674,98.12 102.362,98.501 93.624,98.527 89.459,98.628 158.242,103.607 126.543,105.562 121.971,105.639 117.805,105.74 158.217,107.721 145.161,108.483 121.717,109.144 117.551,109.245 145.136,109.652 126.238,109.728 158.191,110.007 94.386,113.944 102.921,113.944 106.959,113.944 117.932,113.944 98.831,113.97 126.568,113.97 156.032,113.995 111.735,114.021 90.221,114.046 138.862,114.046 153.01,114.046 134.696,114.148 148.844,114.148 84.887,114.224 80.315,114.3 76.149,114.402
GPRS_PWR: R11.2 R19.1 U1.22 | length 41.8
  Top Layer w0.2: U1.22 97.343,96.81 97.025,96.492 97.025,93.493 99.688,90.83 107.518,90.83 107.95,90.399 108.814,90.399 ; R19.1 108.89,90.322 108.814,90.399 ; R11.2 128.524,89.002 127.127,90.399 108.814,90.399
GSM_GPRS: C33.2 D2.1 U5.35 | length 18.9
  Top Layer w0.5: v1(150.546,90.221) 150.546,88.519 C33.2 150.647,86.411 D2.1
  Bottom Layer w0.5: v1(150.546,90.221) 150.546,100.94 152.031,102.424 U5.35
L_OFF: C22.2 P5.1 R22.1 U1.57 | length 41.9
  Top Layer w0.2: R22.1 58.42,92.278 62.052,88.646 72.822,88.646 74.26,90.085 74.26,94.149 77.922,97.81 U1.57
  Top Layer w0.3: P5.1@57.988,94.615 P5.1
  Top Layer w0.5: C22.2 R22.1 57.988,92.862 58.42,93.294 P5.1
L_ON: C23.2 P6.1 R23.1 U1.56 | length 35.9
  Top Layer w0.2: R23.1 65.38,91.186 65.38,89.611 65.938,89.052 72.663,89.052 73.91,90.3 73.91,94.294 77.927,98.31 U1.56
  Top Layer w0.5: C23.2 R23.1 64.922,92.913 P6.1
LED0: U1.61
MCU_RX1: P2.1 U1.43 | length 10.5
  Top Layer w0.2: U1.43 91.175,105 93.795,107.62 96.368,107.62 97.358,108.61 P2.1
MCU_TX1: P2.2 U1.42 | length 11.6
  Top Layer w0.2: U1.42@91.725,103.86 U1.42 91.675,104.934 93.961,107.22 96.552,107.22 99.568,110.236 P2.2
MOTO1: U1.35 U4.2 | length 34.6
  Top Layer w0.3: U1.35 95.175,105.056 95.683,105.564 115.238,105.564 120.034,100.768 126.276,100.768 U4.2
MOTO2: U1.36 U4.3 | length 36.6
  Top Layer w0.3: U1.36 94.675,102.81 95.072,102.413 96.291,102.413 98.789,104.91 113.987,104.91 119.532,99.365 125.139,99.365 U4.3
MOTOR1: P4.1 U4.9 | length 60.5
  Top Layer w0.5: P4.1 71.867,95.946 74.336,95.946 75.834,97.445 75.834,106.212 81.102,111.481 106.68,111.481 v1(111.328,106.832)
  Bottom Layer w0.5: v1(111.328,106.832) 111.883,106.277 U4.9
MOTOR2: P4.2 U4.8 | length 70
  Top Layer w0.5: P4.2 70.485,96.596 74.066,96.596 75.184,97.714 75.184,106.583 81.224,112.624 108.509,112.624 113.462,107.671 v1(113.462,107.518)
  Bottom Layer w0.5: U4.8 112.995,98.171 113.538,98.713 113.538,107.594 v1(113.462,107.518)
NetANT1_1: ANT1.1 U5.60 | length 6.2
  Bottom Layer w0.6: ANT1.1@142.049,76.627 142.145,76.329 ANT1.1@142.146,76.327
  Bottom Layer w0.635: 142.049,80.861 U5.60
  Bottom Layer w1.194: ANT1.1@142.146,76.327 142.146,80.562
NetC15_1: C15.1 C19.2 C20.2 L2.2 Q2.3 R13.1 R14.1 R16.2 | length 17.4
  Top Layer w0.8: R16.2 109.042,85.623 v1(109.169,85.75)
  Bottom Layer w0.8: v1(109.169,85.75) 109.88,86.462 109.88,88.062 111.963,90.145 120.066,90.145 v1(121.031,89.179) 121.133,89.078 v1(121.133,87.833)
  other v1: 121.183,88.544
NetC15_2: C15.2 Q2.1 R12.1 R14.2
NetC16_1: C16.1 L2.1 U3.1 | length 1.9
  Top Layer w0.5: U3.1 118.423,82.508 C16.1
NetC16_2: C16.2 D1.2 U3.2 | length 29
  Top Layer w0.5: v1(115.341,83.693) 115.519,83.515 U3.2
  Top Layer w1: C16.2 119.507,81.153 v1(120.548,82.194) v1(120.548,82.855) ; D1.2 126.924,73.787 127.66,74.524 v1(127.66,76.53)
  Bottom Layer w1: v1(115.341,83.693) 120.548,83.693 ; v1(120.548,82.855) 120.548,83.693 ; 127.711,75.921 127.711,82.347 126.365,83.693 120.548,83.693
NetC21_1: C21.1 U3.6 | length 2.1
  Top Layer w0.5: U3.6 114.249,75.692 C21.1
NetC21_2: C21.2 R20.2 | length 1.8
  Top Layer w0.5: R20.2 C21.2
NetC32_2: C32.2 U5.16 | length 3.2
  Top Layer w0.5: v1(131.711,101.434) 132.676,101.434 C32.2
  Bottom Layer w0.5: U5.16 v1(131.711,101.434)
NetD2_2: D2.2 R27.1 | length 2.2
  Top Layer w0.5: R27.1 152.451,84.201 D2.2
NetL1_1: L1.1 U2.7
NetP7_1: P7.1 R24.1 | length 9.5
  Top Layer w1: v1(79.146,105.054) 80.416,105.054 R24.1
  Bottom Layer w1: v1(79.146,105.054) P7.1
NetP7_2: P7.2 Q3.2 | length 9.7
  Top Layer w1: v1(77.826,106.375) 78.207,106.375 Q3.2
  Bottom Layer w1: P7.2 77.114,107.086 v1@77.775,106.426
NetQ1_1: Q1.1 R11.1 | length 1.8
  Top Layer w0.5: R11.1 131.252,88.763 Q1.1
NetQ1_2: Q1.2 R12.2
NetQ3_2: Q3.1 R25.2 | length 2.6
  Top Layer w0.4: Q3.1 81.928,107.405 R25.2
NetR4_1: R4.1 U5.10 | length 3.5
  Top Layer w0.3: v1(132.004,96.418) 132.156,96.571 R4.1
  Bottom Layer w0.3: U5.10 131.02,95.434 v1(132.004,96.418)
NetR4_2: R4.2 U1.16 | length 51.6
  Top Layer w0.2: U1.16@96.175,91.683 U1.16
  Top Layer w0.3: U1.16 96.175,101.458 98.984,104.267 112.851,104.267 120.369,96.749 128.626,96.749 129.921,98.044 R4.2@133.147,98.044
NetR5_1: R5.1 U5.9 | length 30.9
  Top Layer w0.3: R5.1 107.467,91.872 108.229,91.11 v1@128.118,91.11
  Bottom Layer w0.3: v1(128.245,91.11) 128.346,91.211 128.346,93.472 129.309,94.434 U5.9
NetR5_2: R5.2 U1.17 | length 4.3
  Top Layer w0.2: U1.17 98.175,92.909 99.212,91.872 R5.2
NetR6_1: R6.1 R9.1 U1.24 | length 21.8
  Top Layer w0.2: U1.24 97.175,97.81 96.625,97.26 96.625,93.328 103.175,86.778 103.175,82.448 R9.1 105.486,82.271 R6.1
NetR7_1: R7.1 R10.2 U2.5 | length 7.6
  Top Layer w0.4: R10.2 68.529,76.352 R7.1 70.841,77.8 72.328,79.288 U2.5
NetR8_1: R8.1 U2.6 | length 5.1
  Top Layer w0.4: U2.6 73.36,80.64 73.736,80.264 73.736,78.334 73.152,77.749 R8.1
NetR15_1: R15.1 R17.2 R19.2 U3.3 | length 25.9
  Top Layer w0.3: v1@112.141,83.566 113.716,83.566 114.249,83.033 U3.3
  Top Layer w0.5: R19.2 110.896,86.766 R17.2 110.922,84.785 v1@112.141,83.566
  Top Layer w0.8: R15.1 v1(125.171,77.114)
  Bottom Layer w0.8: v1(112.014,83.642) 113.907,83.642 116.727,80.823 124.003,80.823 125.171,79.654 v1(125.171,77.114)
NetR16_1: R16.1 R21.2 U3.5 | length 8.3
  Top Layer w0.5: R16.1 109.042,80.162 110.287,78.918 R21.2 112.632,77.208 U3.5 U3.5@112.971,77.216
NetR18_2: R18.2 U3.7 | length 4.1
  Top Layer w0.5: U3.7 115.519,76.175 116.51,75.184 R18.2
NetR25_1: R25.1 U1.30 | length 20
  Top Layer w0.2: R25.1 83.541,103.2 v1(84.887,101.854) ; v1(96.85,100.736) 96.924,100.81 U1.30 U1.30@98.125,100.76
  Bottom Layer w0.2: v1(84.887,101.854) 86.004,100.736 v1(96.85,100.736)
NetR201_2: R201.2 SW2.1 | length 5.5
  Bottom Layer w0.7: SW2.1 106.858,85.649 108.89,87.681 R201.2
NetR202_2: R202.2 SW2.2 | length 2.2
  Bottom Layer w0.7: SW2.2 106.832,90.068 R202.2
NetU1_44: U1.44 U5.3 | length 49.3
  Top Layer w0.2: v1@90.675,102.085 v1(90.675,102.159) U1.44 ; v1(107.264,102.159) 107.645,101.778 107.645,97.815 108.737,96.723 v1(117.729,96.723)
  Bottom Layer w0.2: v1(90.675,102.159) v1(107.264,102.159) v1@107.29,102.133 ; v1(117.729,96.723) 119.228,96.723 127.516,88.434 U5.3
OSC32_IN: C3.2 U1.3 Y2.1 | length 9.2
  Top Layer w0.2: C3.2@82.576,89.409 C3.2 84.658,89.306 Y2.1 86.03,90.678 89.002,90.678 89.675,91.352 U1.3
OSC32_OUT: C4.2 U1.4 Y2.2 | length 7.9
  Top Layer w0.2: C4.2@85.649,86.69 87.584,88.625 Y2.2 88.29,89.332 90.175,91.217 U1.4
OSC_IN: C1.2 U1.5 Y1.1 | length 13.9
  Top Layer w0.2: C1.2 87.782,82.728 89.23,82.728 90.373,83.871 Y1.1 90.675,86.078 U1.5
OSC_OUT: C2.2 U1.6 Y1.2 | length 25.3
  Top Layer w0.2: C2.2 86.208,77.851 87.427,79.07 89.256,79.07 90.373,77.953 Y1.2 91.923,77.825 91.923,88.798 91.175,89.546 U1.6
PC1: SW2.4 U1.9 | length 14.1
  Top Layer w0.2: U1.9 92.675,89.743 93.123,89.295 93.123,85.058 93.574,84.607 98.171,84.607 SW2.4
PC2: SW2.3 U1.10 | length 13.3
  Top Layer w0.2: U1.10 93.175,89.809 93.523,89.461 93.523,85.979 93.802,85.7 96.723,85.7 SW2.3
PWON: U1.23 U5.1 | length 46.9
  Top Layer w0.3: U1.23 103.071,97.31 106.477,93.904 132.385,93.904 v1(132.994,94.513)
  Bottom Layer w0.3: U5.1 132.104,86.434 132.994,87.325 v1(132.994,94.513)
RESET: C5.1 R1.2 SW1.1 U1.7 | length 17.8
  Top Layer w0.2: U1.7 91.675,89.611 92.323,88.964 92.323,82.648 SW1.1 95.098,78.08 R1.2 C5.1
SIM_CLK: C30.2 CN1.C3 U5.32 | length 160.5
  Top Layer w0.5: C30.2 v1(60.833,84.303)
  Bottom Layer w0.5: CN1.C3 65.611,84.303 v1(60.833,84.303) 60.63,84.303 57.252,80.924 57.252,73.558 58.75,72.06 152.171,72.06 156.159,76.048 156.159,105.664 153.924,107.899 148.59,107.899 148.049,107.358 U5.32
SIM_DATA: C29.2 CN1.C7 U5.31 | length 165.5
  Top Layer w0.5: v1(56.388,80.543) 57.633,80.543 58.903,81.813 C29.2 v1(60.731,82.321)
  Bottom Layer w0.5: v1(56.388,80.543) 56.388,73 58.344,71.044 152.679,71.044 157.048,75.413 157.048,106.426 154.432,109.042 148.438,109.042 147.049,107.654 U5.31 U5.31@147.056,106.317 ; v1(60.731,82.321) 61.214,82.804 CN1.C7
SIM_RST: CN1.C2 U5.33 | length 129.9
  Bottom Layer w0.5: CN1.C2 65.713,81.407 60.782,81.407 58.141,78.765 58.141,74.524 59.588,73.076 128.753,73.076 130.607,74.93 130.607,81.585 137.719,88.697 137.719,100.101 140.487,102.87 147.244,102.87 149.049,104.675 U5.33
SIM_VCC: C31.2 CN1.C1 CN1.C6 U5.30 | length 115.1
  Top Layer w0.7: C31.2 v1(60.884,78.918)
  Bottom Layer w0.7: v1@60.935,78.867 v1(60.884,78.918) 65.764,78.918 CN1.C1 ; CN1.C6 CN1.C1 ; U5.30 146.049,105.053 145.085,104.089 139.979,104.089 136.512,100.622 136.512,89.218 129.616,82.321 129.616,75.946 127.914,74.244 71.202,74.244 66.722,78.724 66.11,78.724 CN1.C1
SW1: C24.2 P8.1 R26.1 U1.58 | length 48
  Top Layer w0.2: R26.1 52.273,92.278 56.312,88.24 73.203,88.24 74.66,89.697 74.66,93.939 78.031,97.31 U1.58
  Top Layer w0.5: C24.2 R26.1 51.613,92.481 P8.1
SWCLK: P1.1 U1.49 | length 9.9
  Top Layer w0.2: U1.49 86.675,103.85 84.963,105.562 84.963,108.28 P1.1
SWDIO: P1.2 U1.46 | length 7
  Top Layer w0.2: P1.2 88.976,109.753 88.976,108.026 89.675,107.327 U1.46 U1.46@89.625,103.86
V3.3: C6.2 C7.2 C8.2 C9.2 C10.2 C11.2 C12.2 C13.2 L1.2 P1.3 P2.3 R1.1 R7.2 R8.2 R22.2 R23.2 R26.2 R201.1 R202.1 U1.13 U1.19 U1.32 U1.48 U1.64 U2.4 U2.8 | length 233.5
  Top Layer w0.3: v1@87.859,104.013 88.062,103.81 U1.48 ; 87.944,94.31 89.789,94.31 90.297,94.818 v1(90.297,96.596) ; v1(94.59,96.596) 94.675,96.511 U1.13 94.675,90.643 95.047,90.272 95.91,90.272 96.342,89.84 C9.2 ; U1.19 100.339,95.31 ; U1.32 98.863,101.81 100.152,103.099 C6.2
  Top Layer w0.4: v1(67.996,79.477) 68.351,79.477 68.865,79.99 U2.4
  Top Layer w0.5: C9.2 v1(97.358,88.214) ; R1.1 96.85,79.629 97.307,80.086 v1(97.307,82.575) ; v1(100.965,89.789) 104.165,89.789 v1(104.292,89.916)
  Top Layer w0.7: v1(90.424,107.036) 90.424,108.153 91.973,109.703 P1.3
  Top Layer w0.8: 100.011,96.56 C7.2 ; C6.2 101.422,103.403 v1(102.997,103.403)
  Top Layer w1: v1(50.292,86.792) 50.648,86.436 70.993,86.436 71.933,85.496 ; v1(51.333,89.662) 51.41,89.738 R26.2 ; R22.2 57.988,89.764 v1(58.141,89.611) ; R23.2 64.287,89.662 v1(64.313,89.637) ; R7.2@70.028,76.225 R8.2 72.39,76.2 72.746,76.2 75.489,73.457 81.153,73.457 82.042,74.346 82.042,83.033 81.333,83.741 78.207,83.741 78.207,83.744 79.68,85.217 78.588,85.217 78.283,85.522 v1(78.283,93.929) ; C8.2 83.439,93.269 C11.2 ; 83.541,93.878 84.62,93.878 84.753,94.01 87.644,94.01 87.944,94.31 88.025,94.391 88.025,102.61 87.605,103.03 v1(87.605,104.064) ; v1(85.725,106.959) 86.538,106.959 C12.2 86.995,104.877 v1@87.706,104.165 ; C10.2 100.609,94.107 C7.2
  Bottom Layer w0.5: v1(97.307,82.575) 97.358,82.626 v1(97.358,88.214) 97.358,89.002 98.171,89.814 100.94,89.814 v1(100.965,89.789)
  Bottom Layer w0.7: v1(67.996,79.477) 72.238,79.477 73.914,81.153 v1(73.914,83.388) ; v1(104.292,89.916) 104.292,90.602 105.512,91.821 R202.1 R201.1
  Bottom Layer w1: v1(50.292,86.792) 50.292,88.621 v1(51.333,89.662) 58.09,89.662 v1(58.141,89.611) 64.287,89.611 v1(64.313,89.637) ; v1(78.283,93.929) 80.279,95.926 80.279,95.974 80.836,96.53 80.884,96.53 80.95,96.596 83.388,96.596 ; v1(85.725,106.959) 85.801,107.036 v1(90.424,107.036) 101.346,107.036 102.438,108.128 P2.3 ; v1(99.67,96.596) v1(94.59,96.596) v1(90.297,96.596) 83.388,96.596 ; v1(102.997,103.403) 83.999,103.403 83.388,102.793 83.388,96.596
  other v1: 73.965,82.271
V3.8: C25.2 C26.2 C27.2 C28.2 Q2.2 R13.2 U5.55 U5.56 U5.57 | length 39.1
  Top Layer w0.7: C26.2 143.866,86.639 C28.2 ; C28.2@144.856,86.36 145.049,86.167 v1(145.049,85.003) ; v1(146.05,84.938) 146.05,85.75 C27.2 ; v1(147.049,84.946) 147.074,84.946 C25.2
  Top Layer w1: Q2.2 134.302,77.584 134.976,78.257 134.976,83.947 135.992,84.963 v1(136.601,84.963)
  Bottom Layer w0.7: U5.57 v1(145.049,85.003) ; U5.56 v1(146.05,84.938) v1(146.05,84.938) 147.041,84.938 v1(147.049,84.946) U5.55
  Bottom Layer w0.762: v1(135.636,84.861) 135.738,84.963 v1(136.601,84.963) 136.642,85.003 v1(145.049,85.003) 145.984,85.003 v1(146.05,84.938)
pads on no net: U1.1 U1.2 U1.8 U1.11 U1.14 U1.15 U1.20 U1.21 U1.25 U1.26 U1.27 U1.29 U1.33 U1.34 U1.37 U1.38 U1.39 U1.40 U1.41 U1.45 U1.50 U1.51 U1.52 U1.53 U1.54 U1.55 U1.59 U1.62 U4.4 U4.5 U4.6 U4.7 U5.2 U5.4 U5.5 U5.6 U5.7 U5.8 U5.11 U5.12 U5.13 U5.14 U5.15 U5.19 U5.20 U5.21 U5.22 U5.23 U5.24 U5.25 U5.26 U5.27 U5.28 U5.34 U5.36 U5.38 U5.40 U5.41 U5.42 U5.43 U5.44 U5.47 U5.48 U5.49 U5.50 U5.51 U5.52 U5.65 U5.66 U5.67 U5.68
copper on no net:
  other v1: 48.87,89.433

## Polygon pours and split planes (outlines as drawn)
NetC15_1 on Top Layer "BATT" (solid, pour order 92): 124.435,89.687 130.124,83.998 130.124,79.197 129.87,78.943 129.108,78.943 128.397,79.654 128.397,83.312 127.533,84.176 120.929,84.176 119.685,85.42 117.983,85.42 117.348,86.055 117.348,88.951 118.085,89.687
V3.8 on Top Layer "BATT" (solid, pour order 90): 125.12,83.718 125.12,80.315 128.295,77.14 131.14,77.14 131.394,77.394 131.394,78.08 131.191,78.283 128.6,78.283 126.492,80.391 126.492,83.769 126.365,83.896 125.273,83.896
BATT on Top Layer "BATT" (solid, pour order 40): 67.005,81.407 68.021,80.391 70.358,80.391 70.383,80.416 70.383,80.848 70.333,80.899 68.758,80.899 68.504,81.153 68.504,81.559 68.631,81.686 70.358,81.686 70.409,81.737 70.409,82.525 69.748,83.185 66.142,83.185 65.862,82.906 65.862,81.61 66.065,81.407
NetQ1_2 on Top Layer "Top Layer-No Net" (solid, pour order 28): 129.819,85.954 133.756,85.954 133.985,85.725 133.985,84.709 133.833,84.557 132.309,84.557 132.08,84.785 129.845,84.785 129.718,84.912 129.718,85.903
NetC15_2 on Top Layer "Top Layer-No Net" (solid, pour order 18): 130.81,79.273 130.81,80.594 130.531,80.874 130.556,80.899 130.556,83.972 130.708,84.125 133.731,84.125 134.087,83.769 134.087,79.781 133.401,79.096 130.886,79.096 130.835,79.146
BATT on Top Layer "Top Layer-No Net" (solid, pour order 30): 116.408,78.08 118.618,78.08 119.405,78.867 123.19,78.867 123.774,78.283 123.774,73.482 123.292,73 119.837,73 119.507,73.33 119.507,75.87 119.101,76.276 116.637,76.276 116.256,76.657 116.256,77.826
V3.3 on Top Layer "BATT" (solid, pour order 46): 71.628,81.712 79.604,81.712 80.391,82.499 80.391,85.7 79.858,86.233 72.263,86.233 71.526,85.496 71.526,81.813
NetL1_1 on Top Layer "BATT" (solid, pour order 54): 75.311,81.534 77.749,79.096 80.086,79.096 80.696,78.486 80.696,75.59 80.289,75.184 76.175,75.184 74.219,77.14 74.219,80.467 73.635,81.051 71.603,81.051 71.603,81.534
NetC16_1 on Top Layer "Top Layer-No Net" (solid, pour order 8): 111.582,89.23 111.582,85.573 112.852,84.303 115.672,84.303 116.357,83.617 116.357,81.813 116.586,81.585 117.373,81.585 117.78,81.991 119.329,81.991 119.558,82.22 119.558,83.541 118.618,84.48 117.246,84.48 114.503,87.224 114.503,89.078 114.122,89.459 111.811,89.459
GND on Top Layer "BATT" (solid, remove dead copper, pour order 100): 37.033,126.543 165.964,126.543 173.33,119.177 165.379,111.227 165.379,56.337 39.802,56.337 36.068,60.071
GND on Bottom Layer "BATT" (solid, remove dead copper, pour order 96): 28.118,128.651 167.919,128.651 183.947,112.624 167.615,96.291 167.615,62.535 41.173,62.535 35.535,68.174

## Keep-outs
Keep-Out Layer:
  lines w0.013: 44.913,93.554 ccw(c45.213,93.554) 45.213,93.254 45.613,93.254 cw(c45.613,92.954) 45.913,92.954 45.913,72.554 45.913,70.554 ccw(c46.213,70.554) 46.213,70.254 158.613,70.254 ccw(c158.613,70.554) 158.913,70.554 158.913,72.554 158.913,92.954 cw(c159.213,92.954) 159.213,93.254 159.613,93.254 ccw(c159.613,93.554) 159.913,93.554 159.913,111.954 159.913,114.954 ccw(c159.613,114.954) 159.613,115.254 74.213,115.254 ccw(c74.213,114.954) 73.913,114.954 73.913,111.954 73.913,97.554 cw(c73.613,97.554) 73.613,97.254 45.213,97.254 ccw(c45.213,96.954) 44.913,96.954 44.913,93.554

## Silkscreen, mask and mechanical layers (free items; w line width, h text height)
Top Overlay:
  text "DK-LOCK-V1.2" at 46.558,74.041 h1.5
  text "2018-04-08" at 46.609,71.526 h1.5
Bottom Solder:
  lines w0.013: 73.913,111.954 73.913,114.954 ; 159.913,111.954 159.913,114.954